# Altium PCB Glucometer-E.C.- Full V1.PcbDoc
Units mm, origin at the board's own origin, x right, y up, seen from the top; angles counter-clockwise.
Board outline 55 x 70 mm, 2 copper layers (Top Layer, Bottom Layer); 47 components, 57 nets, 234 pads, 33 vias.
Unrouted connection lines stored in the file: 1.
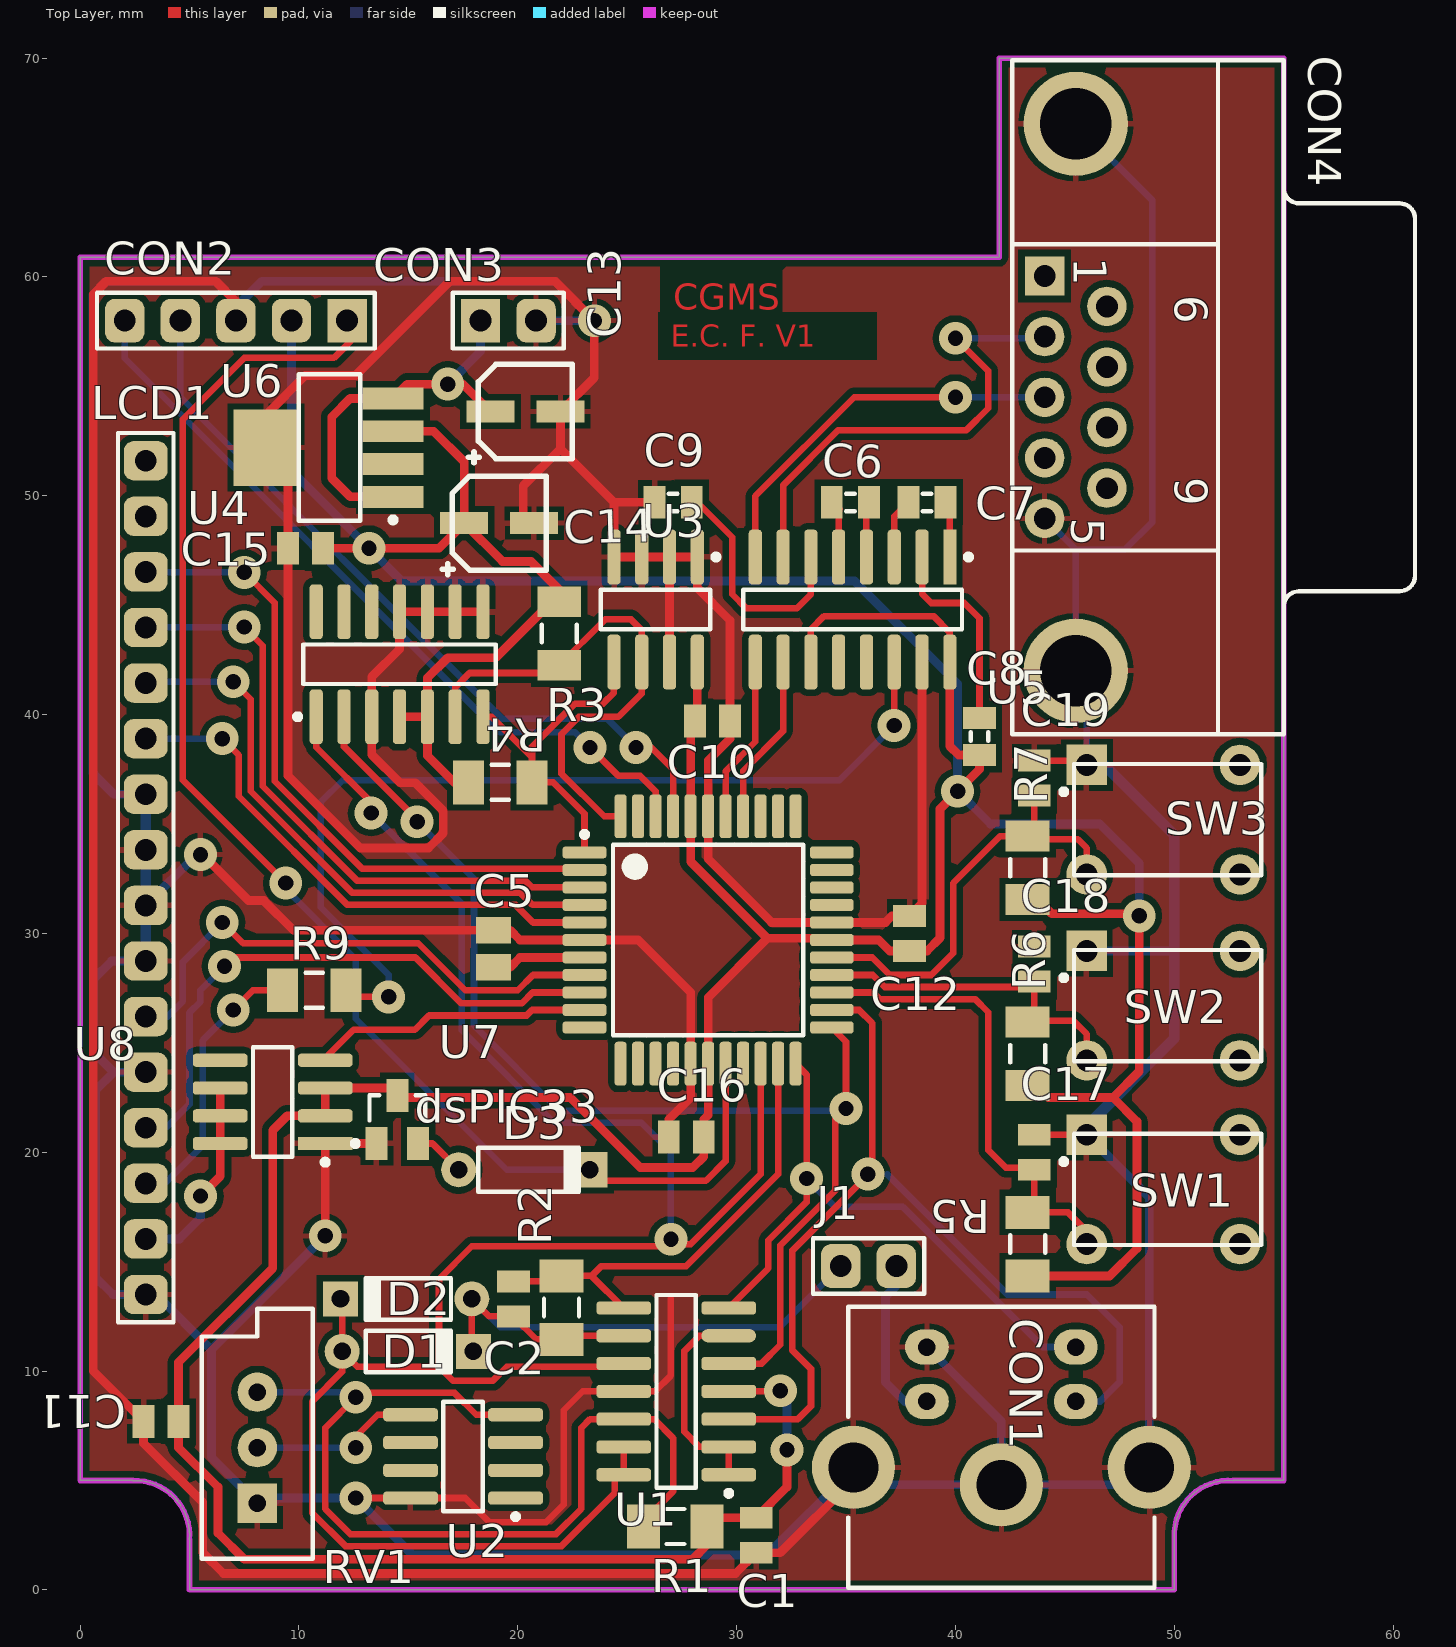
[diagram p0: Top Layer view]
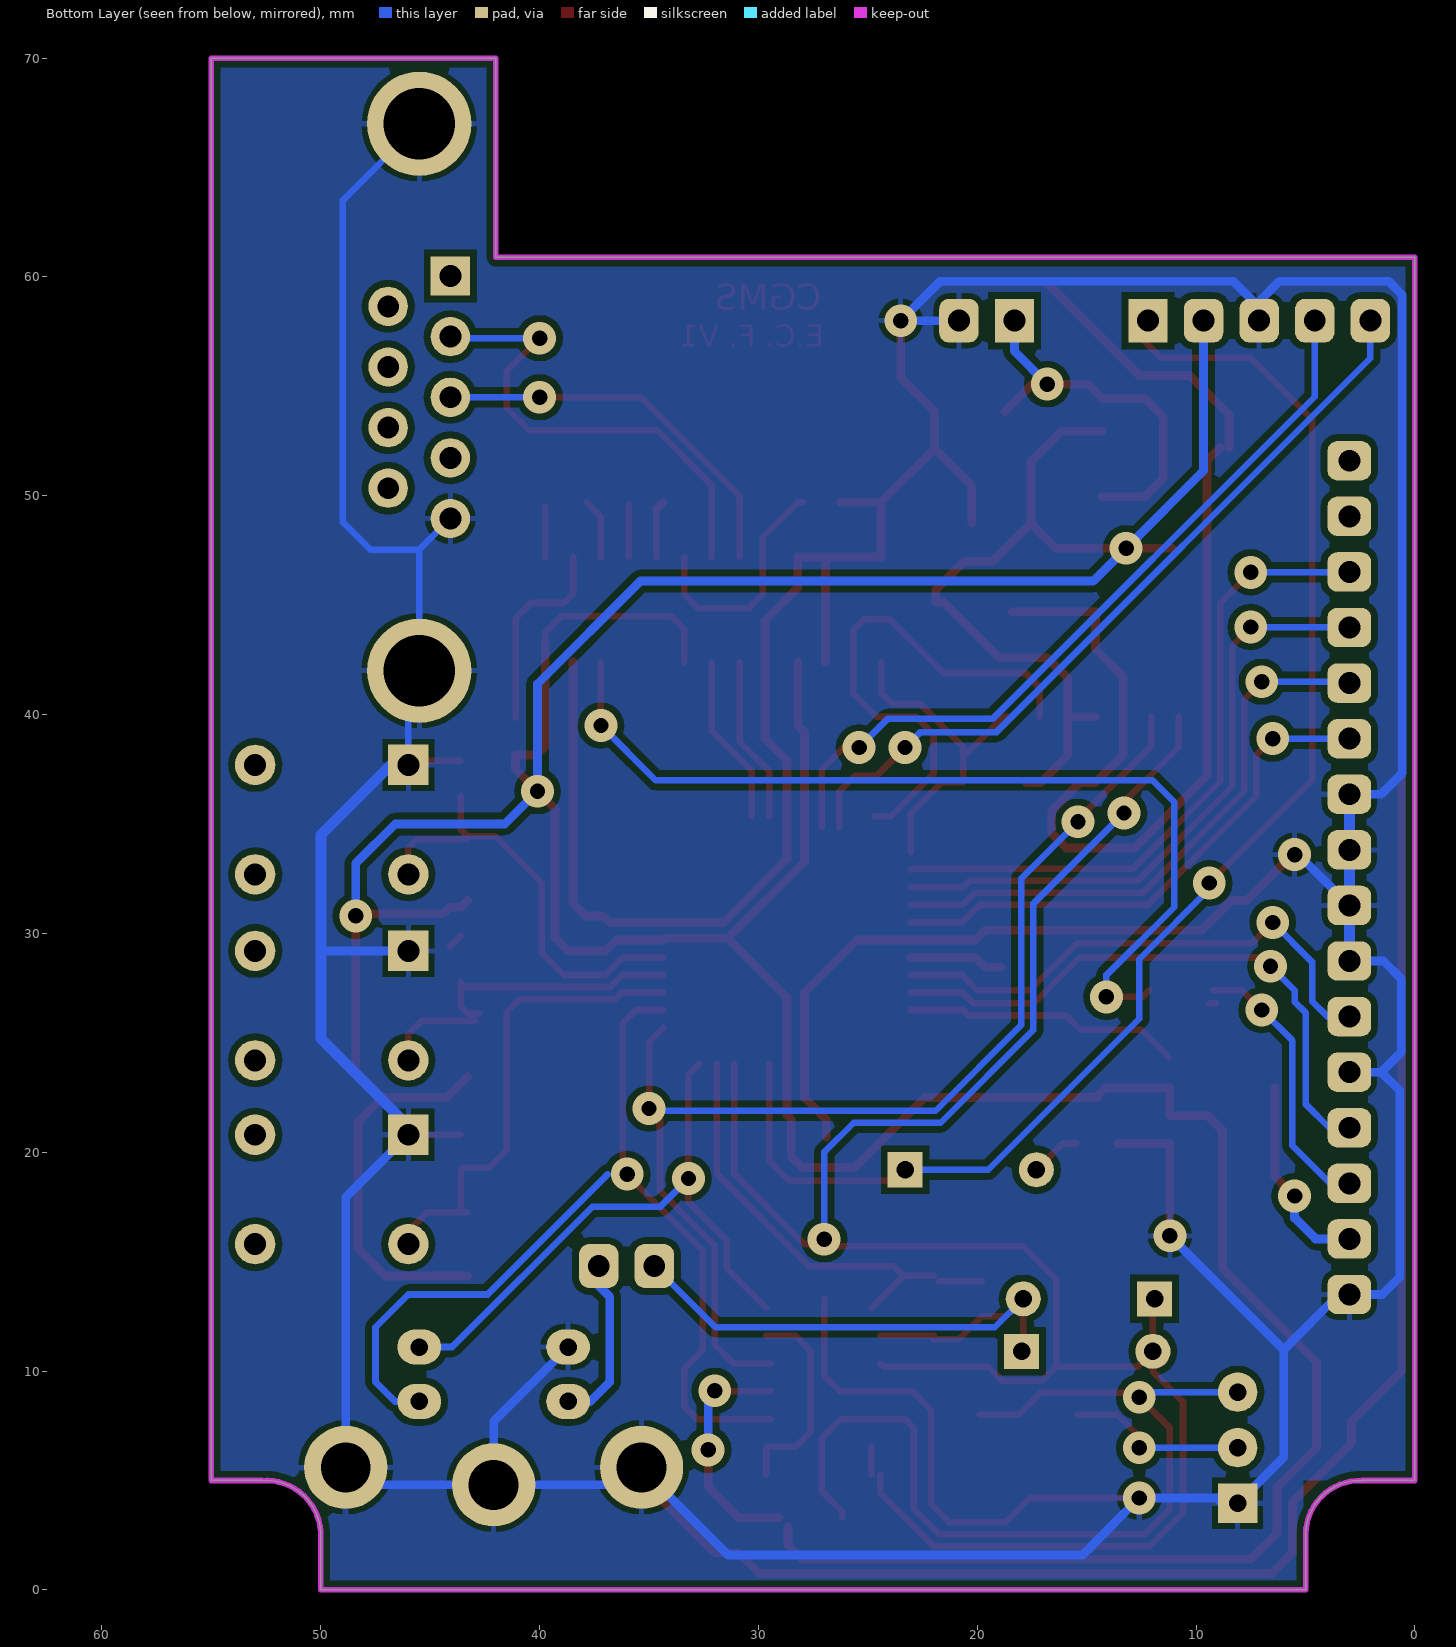
[diagram p1: Bottom Layer view, seen from below]

## Layer stack, top to bottom
Top Layer: signal copper 0.0356
Dielectric: dielectric 0.32, FR-4, Dk 4.8
Bottom Layer: signal copper 0.0356

## Board outline
0,5 2.4,5 2.4,4.998 cw(c2.5,2.5) 4.992,2.301 5,2.301 5,0 50,0 50,2.4 50.002,2.4 cw(c52.5,2.5) 52.699,4.992 52.699,5 55,5 55,70 42,70 42,60.9 0,60.9

## Design rules (kind name [scope] priority, off if disabled: settings)
Clearance [All] p1: gap=0.25
PolygonConnect [All] p1: connectstyle=Relief reliefconductorwidth=0.254 reliefentries=4 polygonreliefangle="90 Angle" airgapwidth=0.254
RoutingVias [All] p1: holewidth=0.711 width=1.27 viastyle="Through Hole" minholewidth=0.711 minwidth=1.27 maxholewidth=0.711 maxwidth=1.27
SolderMaskExpansion [All] p1: expansion=0.102
Width [All] p1: maxlimit=5 minlimit=0.25 preferedwidth=0.3 minimp=50.000000 maximp=50.000000 favimp=50.000000
28 further rules are at their usual default settings.

## Classes and differential pairs
component class "Glucometer-E.C.- Full V1": C1 C2 C5 C6 C7 C8 C9 C10 C13 C14 C15 C16 C17 C18 C19 CON1 CON3 CON4 D1 D2 D3 J1 LCD1 R1 R2 R3 R4 R5 R6 R7 R9 RV1 SW1 SW2 SW3 U1 U2 U3 U4 U5 U6 U7 U8

## Components (designator, comment, footprint, x,y, rotation, side; value= is the part's Value field where it differs from the comment)
C1 "Cap2" CAPC1608N 30.9,2.5 r270 top
C2 "Cap2" CAPC1608N 19.8,13.3 r90 top
C5 "Cap" CAPC2012N 18.9,29.3 r270 top
C6 "Cap" RESC1608N 38.7,49.7 r180 top
C7 "Cap" RESC1608N 35.2,49.7 r180 top
C8 "Cap" RESC1608N 41.1,39 r90 top
C9 "Cap" RESC1608N 27.1,49.7 r180 top
C10 "Cap" CAPC1608N 28.9,39.7 r180 top
C11 "Cap" CAPC1608N 3.7,7.7 r0 top
C12 "Cap" CAPC1608N 37.9,30 r270 top
C13 "Cap Pol2" C-4x4 22.5,56 r180 top
C14 "Cap Pol2" C-4x4 21.3,50.9 r180 top
C15 "Cap" CAPC1608N 10.3,47.6 r0 top
C16 "Cap" CAPC1608N 27.7,20.7 r0 top
C17 "Cap" CAPC1608N 43.6,20 r270 top
C18 "Cap" CAPC1608N 43.6,28.6 r270 top
C19 "Cap" CAPC1608N 43.6,37.1 r270 top
CON1 "" CDIN2.6-3H4A 42.1,0.1 r90 top
CON2 "Header 5" HDR1X5 12.2,58 r180 top
CON3 "Header 2" HDR1X2#1 18.3,58 r0 top
CON4 "D Connector 9" DSUB1.385-2H9 55,54.5 r270 top
D1 "1N4148" DO-35#1 15,10.9 r0 top
D2 "1N4148" DO-35#2 15,13.3 r180 top
D3 "1N4148" DO-35#3 20.5,19.2 r0 top
dsPIC33 "DSPIC33FJ64MC804-I/PT" TQFP-PT44_N 28.7,29.7 r0 top
J1 "Header 2" HDR1X2#2 37.3,14.8 r180 top
LCD1 "162A" HDR1X16 3,13.5 r90 top locked
R1 "Res1" RESC3216N#1 27.2,2.9 r0 top
R2 "Res1" RESC3216N#1 22,12.9 r270 top
R3 "Res1" RESC3216N#2 21.9,43.7 r270 top
R4 "Res1" RESC3216N#2 19.2,36.9 r0 top
R5 "Res1" RESC3216N#1 43.3,15.8 r270 top
R6 "Res1" RESC3216N#2 43.3,24.5 r270 top
R7 "Res1" RESC3216N#2 43.3,33 r270 top
R9 "Res1" RESC3216N#2 10.7,27.4 r0 top
RV1 "RPot" VR5 8.1,6.5 r90 top
SW1 "SW-PB" DPST-4 49.7,18.3 r0 top
SW2 "SW-PB" DPST-4 49.7,26.7 r0 top
SW3 "SW-PB" DPST-4 49.7,35.2 r0 top
U1 "LMC6044IN" M14A_N 27.241,9.074 r180 top
U2 "LM385BM" M08A_N 17.5,6.1 r180 top
U3 "24AA1025-I/SN" SOIC-SN8_N 26.3,44.8 r270 top
U4 "AD5241" R-14_N 14.6,42.3 r90 top
U5 "MAX3232CSE" NSO16_N 35.3,44.8 r270 top
U6 "LP38693MP-3.3/NOPB" MP05A_N 11.4,52.2 r180 top
U7 "Supply Voltage Supervisor" SOT23 14.5,21.5 r0 top
U8 "Power Switch ST" SO8_N 8.8,22.3 r180 top

## Footprints (in the part's own frame and the unit in brackets; to place one, negate y for a bottom-side part, rotate by r counter-clockwise, add the part's x,y. Pads: shape width x height; smd on the part's side, far side on the other; paste and mask are expansions set on the pad)
C-4x4 [mm] "SMD Polar Aluminium Capacitor, 4x4mm, 10V"
  rect 2.2x1 smd: 1(3.75,2.15) 2(0.55,2.15)
  silkscreen extent 0,0 4.75,4.5, body extent 0,0 4.3,4.3, height 5.4
CAPC1608N [mm] "Chip Capacitor, Body 1.6x0.8mm, IPC Medium Density"
  rect 1x1.5 smd: 1(-0.8,0) 2(0.8,0)
  body extent -0.87,-0.48 0.87,0.48, height 0.85
CAPC2012N [mm] "Chip Capacitor, Body 2.0x1.3mm, IPC Medium Density"
  rect 1.2x1.6 smd: 1(-0.85,0) 2(0.85,0)
  body extent -1.1,-0.72 1.1,0.72, height 1.1
CDIN2.6-3H4A [mm] "Connector; Circular DIN, Thru-Hole; 4 Position; Right Angle; Pitch 2.1/2.6 mm; Body 14 x 12.84 x 13 mm (WxTxH), Shielded, Special PCB Retention"
  oval 1.6x2 hole 0.8: 1(8.51,-3.4) 2(8.51,3.4) 3(11,-3.4) 4(11,3.4)
  round 3.8 hole 2.28: MH1(5.5,-6.76) MH2(4.7,0) MH3(5.5,6.76)
  silkscreen extent 0,-7 12.84,7, body extent 0,-7 12.84,7, height 13
DO-35#1 [mm] "Diode, Axial; Body 3.8 x 1.9 mm (LxDia. max), Lead Dia. 0.53 mm (max)"
  round 1.6 hole 0.8: 1(-3.025,0)
  rect 1.6x1.6 hole 0.8: 2(2.975,0)
  silkscreen extent -1.95,-0.95 2.05,0.95
DO-35#2 [mm] "Diode, Axial; Body 3.8 x 1.9 mm (LxDia. max), Lead Dia. 0.53 mm (max)"
  round 1.6 hole 0.8: 1(-2.9,0)
  rect 1.6x1.6 hole 0.8: 2(3.1,0)
  silkscreen extent -1.95,-0.95 2.05,0.95
DO-35#3 [mm] "Diode, Axial; Body 4.6 x 2 mm (LxDia. max), Lead Dia. 0.53 mm (max)"
  round 1.6 hole 0.8: 1(-3.2,0)
  rect 1.6x1.6 hole 0.8: 2(2.8,0)
  silkscreen extent -2.3,-1 2.4,1
DPST-4 [mm] "Switch; 4 Leads"
  rect 1.85x1.85 hole 1: 1(-3.7,2.5)
  round 1.85 hole 1: 2(-3.7,-2.5) 3(3.3,-2.5) 4(3.3,2.5)
  silkscreen extent -4.88,-2.54 4.28,2.54
DSUB1.385-2H9 [mm] "Connector; D Subminiature; 9 Position; Right Angle; Pitch 1.385 mm"
  rect 1.8x1.8 hole 1: 1(-5.54,-10.92)
  round 1.8 hole 1: 2(-2.77,-10.92) 3(0,-10.92) 4(2.77,-10.92) 5(5.54,-10.92) 6(-4.155,-8.08) 7(-1.385,-8.08) 8(1.385,-8.08) 9(4.155,-8.08)
  round 4.76 hole 3.26: 10(-12.495,-9.5) 11(12.495,-9.5)
  silkscreen extent -15.4,-12.4 15.4,6
HDR1X2#1 [mm] "Connector; Header; 2 Position"
  rect 1.8x2 hole 1: 1(0,0)
  rrect50% 1.8x2 hole 1: 2(2.54,0)
  silkscreen extent -1.27,-1.27 3.81,1.27
HDR1X2#2 [mm] "Connector; Header; 2 Position"
  rrect50% 1.8x2 hole 1: 1(0,0) 2(2.54,0)
  silkscreen extent -1.27,-1.27 3.81,1.27
HDR1X5 [mm] "Connector; Header; 5 Position"
  rect 1.8x2 hole 1: 1(0,0)
  rrect50% 1.8x2 hole 1: 2(2.54,0) 3(5.08,0) 4(7.62,0) 5(10.16,0)
  silkscreen extent -1.27,-1.27 11.43,1.27
HDR1X16 [mm] "Connector; Header; 16 Position"
  rrect50% 1.8x2 hole 1: 1(0,0) 2(2.54,0) 3(5.08,0) 4(7.62,0) 5(10.16,0) 6(12.7,0) 7(15.24,0) 8(17.78,0) 9(20.32,0) 10(22.86,0) 11(25.4,0) 12(27.94,0) 13(30.48,0) 14(33.02,0) 15(35.56,0) 16(38.1,0)
  silkscreen extent -1.27,-1.27 39.37,1.27
M08A_N [mm] "SOIC, 8-Leads, Body 4.9x3.9mm, Pitch 1.27mm, IPC Medium Density"
  rrect50% 2.5x0.6 smd: 1(-2.4,1.905) 2(-2.4,0.635) 3(-2.4,-0.635) 4(-2.4,-1.905) 5(2.4,-1.905) 6(2.4,-0.635) 7(2.4,0.635) 8(2.4,1.905)
  silkscreen extent -2.53,-2.5 0.9,2.88, body extent -2,-2.5 2,2.5, height 1.75
M14A_N [mm] "SOIC, 14-Leads, Body 8.6x3.9mm, Pitch 1.27mm, IPC Medium Density"
  rrect50% 2.5x0.6 smd: 1(-2.4,3.81) 2(-2.4,2.54) 3(-2.4,1.27) 4(-2.4,0) 5(-2.4,-1.27) 7(-2.4,-3.81) 8(2.4,-3.81) 9(2.4,-2.54) 10(2.4,-1.27) 11(2.4,0) 12(2.4,1.27) 13(2.4,2.54) 14(2.4,3.81)
  oval 2.5x0.6 smd: 6(-2.4,-2.54)
  silkscreen extent -2.53,-4.4 0.9,4.78, body extent -2,-4.38 2,4.38, height 1.75
MP05A_N [mm] "SOT223, 5-Leads, Body 6.5x3.5mm, Pitch 1.5mm, Lead Span 7mm, IPC Medium Density"
  rect 2.8x1 smd: 1(-2.9,2.25) 2(-2.9,0.75) 3(-2.9,-0.75) 4(-2.9,-2.25)
  rect 3x3.5 smd: 5(2.9,0)
  silkscreen extent -3.03,-3.35 1.4,3.42, body extent -1.85,-3.35 1.85,3.35, height 1.8
NSO16_N [mm] "SOIC, 16-Leads, Body 9.9x3.9mm, Pitch 1.27mm, IPC Medium Density"
  rect 2.5x0.6 smd: 1(-2.4,4.445)
  rrect50% 2.5x0.6 smd: 2(-2.4,3.175) 3(-2.4,1.905) 4(-2.4,0.635) 5(-2.4,-0.635) 6(-2.4,-1.905) 7(-2.4,-3.175) 8(-2.4,-4.445) 9(2.4,-4.445) 10(2.4,-3.175) 11(2.4,-1.905) 12(2.4,-0.635) 13(2.4,0.635) 14(2.4,1.905) 15(2.4,3.175) 16(2.4,4.445)
  silkscreen extent -2.52,-5 0.9,5.42, body extent -2,-5 2,5, height 1.75
R-14_N [mm] "14-Pin Narrow Body Small Outline Integrated Circuit 1.27 mm Pitch, IPC Medium Density"
  rrect50% 2.5x0.6 smd: 1(-2.4,3.81) 2(-2.4,2.54) 3(-2.4,1.27) 4(-2.4,0) 5(-2.4,-1.27) 6(-2.4,-2.54) 7(-2.4,-3.81) 8(2.4,-3.81) 9(2.4,-2.54) 10(2.4,-1.27) 11(2.4,0) 12(2.4,1.27) 13(2.4,2.54) 14(2.4,3.81)
  silkscreen extent -2.52,-4.4 0.9,4.78, body extent -1.95,-4.33 1.95,4.33, height 1.75
RESC1608N [mm] "Chip Resistor, Body 1.6x0.8mm, IPC Medium Density"
  rect 1x1.5 smd: 1(-0.85,0) 2(0.85,0)
  silkscreen extent -0.2,-0.4 0.2,0.4, body extent -0.85,-0.48 0.85,0.48, height 0.6
RESC3216N#1 [mm] "Chip Resistor, Body 3.2x1.6mm, IPC Medium Density"
  rect 1.5x2 smd: 1(-1.45,0) 2(1.45,0)
  silkscreen extent -0.4,-0.8 0.4,0.8, body extent -1.68,-0.87 1.68,0.87, height 0.71
RESC3216N#2 [mm] "Chip Resistor, Body 3.2x1.6mm, IPC Medium Density"
  rect 1.4x2 smd: 1(-1.45,0) 2(1.45,0)
  silkscreen extent -0.4,-0.8 0.4,0.8, body extent -1.68,-0.87 1.68,0.87, height 0.71
SO8_N [mm] "SOIC, 8-Leads, Body 4.9x3.9mm, Pitch 1.27mm, IPC Medium Density"
  rect 2.5x0.6 smd: 1(-2.4,1.905)
  rrect50% 2.5x0.6 smd: 2(-2.4,0.635) 3(-2.4,-0.635) 4(-2.4,-1.905) 5(2.4,-1.905) 6(2.4,-0.635) 7(2.4,0.635) 8(2.4,1.905)
  silkscreen extent -2.53,-2.5 0.9,2.88, body extent -2,-2.5 2,2.5, height 1.75
SOIC-SN8_N [mm] "SOIC, 8-Leads, Body 4.9x3.8mm, Pitch 1.27mm, IPC Medium Density"
  rrect50% 2.5x0.6 smd: 1(-2.4,1.905) 2(-2.4,0.635) 3(-2.4,-0.635) 4(-2.4,-1.905) 5(2.4,-1.905) 6(2.4,-0.635) 7(2.4,0.635) 8(2.4,1.905)
  silkscreen extent -2.52,-2.5 0.9,2.88, body extent -2,-2.5 2,2.5, height 1.75
SOT23 [mm] "SOT-23; 3 Leads; Body 3.0 x 2.6 mm, inc. leads (LxW max)"
  rect 1x1.5 smd: 1(-0.95,-1.1) 2(0.95,-1.1) 3(0,1.1)
  silkscreen extent -2.05,-1.22 1.28,1.1
TQFP-PT44_N [mm] "Thin QFP, 44-Leads, Body 10x10mm, Pitch 0.8mm, IPC Medium Density"
  rrect50% 2x0.55 smd: 1(-5.65,4) 2(-5.65,3.2) 3(-5.65,2.4) 4(-5.65,1.6) 5(-5.65,0.8) 6(-5.65,0) 7(-5.65,-0.8) 8(-5.65,-1.6) 9(-5.65,-2.4) 10(-5.65,-3.2) 11(-5.65,-4) 23(5.65,-4) 24(5.65,-3.2) 25(5.65,-2.4) 26(5.65,-1.6) 27(5.65,-0.8) 28(5.65,0) 29(5.65,0.8) 30(5.65,1.6) 31(5.65,2.4) 32(5.65,3.2) 33(5.65,4)
  rrect50% 0.55x2 smd: 12(-4,-5.65) 13(-3.2,-5.65) 14(-2.4,-5.65) 15(-1.6,-5.65) 16(-0.8,-5.65) 17(0,-5.65) 18(0.8,-5.65) 19(1.6,-5.65) 20(2.4,-5.65) 21(3.2,-5.65) 22(4,-5.65) 34(4,5.65) 35(3.2,5.65) 36(2.4,5.65) 37(1.6,5.65) 38(0.8,5.65) 39(0,5.65) 40(-0.8,5.65) 41(-1.6,5.65) 42(-2.4,5.65) 43(-3.2,5.65) 44(-4,5.65)
  silkscreen extent -5.77,-4.35 4.35,4.95, body extent -5,-5 5,5, height 1.2
VR5 [mm] "Thru-Hole; 3 Leads"
  rect 1.8x1.8 hole 0.8: 1(-2.54,0)
  round 1.8 hole 0.8: 2(0,0) 3(2.54,0)
  silkscreen extent -5.08,-2.54 6.35,2.54

## Part data
C1 C2 C5 C6 C7 C8 C9 C10 C11 C12 C15 C16 C17 C18 C19: "Capacitor"
C13 C14: "Polarized Capacitor (Axial)"
CON1: library part "MiniDin 4Pins - SuperVideo", "MiniDin 4 Pins"
CON2: "Header, 5-Pin"
CON3 J1: "Header, 2-Pin"
CON4: "Receptacle Assembly, 9 Position, Right Angle"
D1 D2 D3: "High Conductance Fast Diode"
dsPIC33: "High-Performance 16-bit Digital Signal Controller, 64 KB Flash, 16 KB RAM, 44-Pin TQFP, Industrial Temperature"
LCD1: "16 char * 2 line LCD character display with b/light"
R1 R2 R3 R4 R5 R6 R7 R9: "Resistor"
RV1: "Potentiometer"
SW1 SW2 SW3: "Switch"
U1: "CMOS Quad Micropower Operational Amplifier, 14-pin MDIP"
U2: "Adjustable Micropower Voltage Reference, 8-pin Narrow SOIC"
U3: "1 Mbit, 400kHz, 1.7V, 8-Pin SOIC 150mil, Industrial Temperature"
U4: "AD5241BR"
U5: "3.0V TO 5.5V, Low-Power, up to 1Mbps, True RS-232 Transceiver Using Four 0.1µF External Capacitor"
U6: "500mA Low Dropout CMOS Linear Regulators Stable with Ceramic Output Capacitors, 5-pin SOT-223, Pb-Free"
U8: "STMPS2161"

## Via types
v1: diameter 1.5, hole 0.7, Top Layer to Bottom Layer, 33 vias

## Nets (pads, with @x,y where several pads share a name; then routed paths per layer and width w, separated by ;. In a path a pad name is that pad's centre, name@x,y a point inside that pad or via, vN(x,y) a via of type N, cw(c..) or ccw(c..) an arc to the next point about the centre after c; other vN are vias at no path point)
3.3V: C1.1 C8.1 C10.2 C11.2 C12.2 C14.1 C15.2 C16.2 CON2.2 dsPIC33.17 dsPIC33.28 dsPIC33.40 R1.2 R3.1 R4.1 R5.2 R6.2 R7.2 U1.4 U3.8 U4.4 U4.5 U5.11 U5.16 U6.3 U7.3 U8.2 U8.3 | length 260.8
  Top Layer w0.3: U1.4@29.441,9.074 v1@31.974,9.074 ; U5.11 33.395,43.895 34,44.5 39,44.5 39.745,43.755 U5.16@39.745,43.296
  Top Layer w0.4: C15.2 v1(13.2,47.6) 16.4,47.6 C14.1 ; U6.3 16.15,52.95 17.55,51.55 C14.1 ; U7.3@14.5,22.5 22.4,22.5 25.6,19.3 28,19.3 28.5,19.8 C16.2 28.5,21.5 28.7,21.7 dsPIC33.17 28.7,27.069 31.406,29.775 ; U7.3 14.165,22.935 U8.3 U8.2 9.465,21.665 8.8,21 8.8,14.7 4.5,10.4 C11.2 4.5,6.5 6.3,4.7 6.3,2.6 7.5,1.4 28,1.4 28.65,2.05 R1.2 ; U4.4 U4.5 ; R4.1 17.1,36.9 15.87,38.13 U4.5 ; U3.8 28.205,39.5 27.9,39.195 dsPIC33.40 27.9,33.281 31.406,29.775 ; R1.2@29.05,3.3 C1.1 32.3,4.7 v1(32.3,6.4) ; v1@31.974,9.074 v1(32,9.1) ; U5.16@39.745,43.296 U5.16 39.745,38.555 40.15,38.15 C8.1 41.1,37.5 v1(40.1,36.5) 39.3,35.7 39.3,29.8 38.7,29.2 C12.2 37,29.2 36.5,29.7 dsPIC33.28 34.275,29.775 31.406,29.775 ; R5.2 47.05,14.35 48.3,15.6 48.3,21.4 47.2,22.5 ; R6.2@43.3,23.45 44.25,22.5 47.2,22.5 ; R7.2@43.3,31.5 43.6,31.2 44.1,31.2 44.4,30.9 48.4,30.9 v1(48.4,30.8) 48.4,23.7 47.2,22.5 ; U4.5 15.87,41.67 16.8,42.6 19,42.6 21.55,45.15 R3.1 21.9,45.7 20.6,47 19.3,47 C14.1
  Bottom Layer w0.4: CON2.2 9.66,51.14 v1(13.2,47.6) 14.7,46.1 35.4,46.1 40.1,41.4 v1(40.1,36.5) 41.6,35 46.6,35 48.4,33.2 v1(48.4,30.8) ; v1(32,9.1) 32.3,8.8 v1(32.3,6.4)
-V: R9.2 U5.14 | length 42.8
  Top Layer w0.3: R9.2 12.45,27.1 v1(14.1,27.1) ; v1(37.2,39.5) U5.14@37.2,42.395
  Bottom Layer w0.3: v1(14.1,27.1) 14.1,28.1 11,31.2 11,36 12,37 34.7,37 v1(37.2,39.5)
BTN_D: C19.2 dsPIC33.27 R7.1 SW3.2 | length 19.8
  Top Layer w0.3: dsPIC33.27 36.2,28.9 37,28.1 38.9,28.1 39.9,29.1 39.9,32.3 42.05,34.45 R7.1 43.6,34.75 C19.2 ; R7.1@43.3,34.3 45.6,34.3 46,33.9 SW3.2
BTN_E: C18.2 dsPIC33.26 R6.1 SW2.2 | length 16.6
  Top Layer w0.3: dsPIC33.26 36.222,28.1 36.772,27.55 C18.2@43.6,27.55 ; R6.1@42.75,26.35 R6.1@43.3,26.35 ; C18.2 43.6,26.65 42.95,26 45.4,26 46,25.4 SW2.2
BTN_U: C17.2 dsPIC33.25 R5.1 SW1.2 | length 21.6
  Top Layer w0.3: dsPIC33.25 36.244,27.3 36.544,27 40.9,27 41.5,26.4 41.5,20.1 42.3,19.3 43.5,19.3 C17.2 R5.1@43.6,17.55 ; R5.1 45.15,17.25 46,16.4 SW1.2
CNT: CON1.3 dsPIC33.22 U1.7 | length 28.3
  Top Layer w0.3: U1.7 31.45,14.693 31.45,15.972 33.2,17.722 v1(33.2,18.8) 33.2,23.55 dsPIC33.22
  Bottom Layer w0.3: v1(33.2,18.8) 34.5,17.5 37.6,17.5 44,11.1 CON1.3
DB4: dsPIC33.5 LCD1.11 | length 24.6
  Top Layer w0.3: v1(6.5,38.9) 7.25,38.15 7.25,36.268 12.218,31.3 19.9,31.3 20.7,30.5 dsPIC33.5
  Bottom Layer w0.3: LCD1.11 v1(6.5,38.9)
DB5: dsPIC33.4 LCD1.12 | length 26.8
  Top Layer w0.3: v1(7,41.5) 7.8,40.7 7.8,36.496 12.446,31.85 20.128,31.85 20.678,31.3 dsPIC33.4
  Bottom Layer w0.3: LCD1.12 3.06,41.5 v1(7,41.5)
DB6: dsPIC33.3 LCD1.13 | length 28.8
  Top Layer w0.3: v1(7.5,44) 8.35,43.15 8.35,36.724 12.674,32.4 20.356,32.4 20.656,32.1 dsPIC33.3
  Bottom Layer w0.3: LCD1.13 3.02,44 v1(7.5,44)
DB7: dsPIC33.2 LCD1.14 | length 30.4
  Top Layer w0.3: v1(7.5,46.5) 8.9,45.1 8.9,36.951 12.901,32.95 23,32.95 dsPIC33.2
  Bottom Layer w0.3: LCD1.14@3.02,46.5 v1(7.5,46.5)
E: dsPIC33.8 LCD1.6 | length 24.5
  Top Layer w0.3: v1(6.5,30.5) 7.45,29.55 15.45,29.55 17.6,27.4 20,27.4 20.7,28.1 dsPIC33.8
  Bottom Layer w0.3: LCD1.6 4,26.2 4.7,26.9 4.7,28.7 v1(6.5,30.5)
GND: C1.2 C5.1 C9.2 C10.1 C11.1 C12.1 C13.2 C14.2 C15.1 C16.1 C17.1 C18.1 C19.1 CON1.4 CON1.MH1 CON1.MH2 CON1.MH3 CON2.3 CON3.2 CON4.5 CON4.10 CON4.11 dsPIC33.6 dsPIC33.16 dsPIC33.29 dsPIC33.39 LCD1.1 LCD1.5 LCD1.7 LCD1.8 LCD1.9 LCD1.10 RV1.1 SW1.1 SW2.1 SW3.1 U1.11 U2.8 U3.1 U3.2 U3.3 U3.4 U3.7 U4.3 U4.8 U4.9 U4.10 U4.11 U5.15 U6.5 U7.1 U8.1 | length 524.3
  Top Layer w0.3: v1(12.6,4.2) 17.6,4.2 18.7,3.1 21.3,3.1 22.1,3.9 22.1,8.208 22.966,9.074 U1.11 26.274,9.074 27,9.8 27,13.3 ; C17.1 45.6,20.8 SW1.1@46.1,21.3 ; C18.1@43.6,29.9 C18.1@44.1,29.4 ; C19.1 SW3.1@45.8,37.9 ; SW2.1@46,29.4 SW2.1@46.1,29.4
  Top Layer w0.4: v1@5.4,33.5 v1@5.5,33.5 ; v1(5.5,33.6) v1@5.5,33.5 ; CON2.3 7.12,58.88 6.2,59.8 1.2,59.8 0.6,59.2 0.6,10 C11.1 2.9,6.7 5.6,4 5.6,1.7 6.55,0.75 29.95,0.75 C1.2 32,1.7 35.34,5.04 CON1.MH3 ; U6.5 8.5,53.7 10.3,55.5 12.6,55.5 16.9,59.8 21.7,59.8 v1(23.5,58) 23.5,55.4 C13.2 21.95,52.15 ; U6.5@8.9,52.2 9.5,51.6 C15.1 9.5,37.2 12.8,33.9 15.92,33.9 16.6,34.58 16.6,35.6 15.32,36.88 14.62,36.88 13.33,38.17 U4.3 13.33,41.73 14.6,43 U4.11 U4.10 U4.9 U4.8 ; v1(11.2,16.181) U8.1 U7.1@13.545,20.395 ; C14.2@20.25,48.75 20.25,50.45 21.95,52.15 ; U3.4 U3.3 U3.2 ; U3.4@24.4,47.205 24.4,49.7 ; C9.2 24.4,49.7 ; C16.1 26.9,21.5 27.9,22.5 dsPIC33.16 27.9,27.3 25.5,29.7 dsPIC33.6 20.1,29.7 19.65,30.15 C5.1 9.75,30.15 8.4,31.5 7.7,31.5 5.7,33.5 v1@5.5,33.5 ; U3.7 U3.2 ; U5.15 38.475,31.375 C12.1 37.1,30.8 36.8,30.5 dsPIC33.29 31.6,30.5 28.7,33.4 dsPIC33.39 28.7,37.9 29.7,38.9 C10.1 29.7,44.3 28.205,45.795 U3.1 U3.2 ; 21.95,52.15 24.4,49.7
  Bottom Layer w0.3: CON4.5 45.5,47.54 ; CON4.10 49,63.495 49,48.8 47.74,47.54 45.5,47.54 ; SW3.1 46,41.505 CON4.11 45.5,47.54
  Bottom Layer w0.4: LCD1.5 1.54,23.66 ; LCD1.7 1.44,28.74 0.627,27.927 0.627,24.573 1.54,23.66 ; LCD1.8 v1@5.32,33.6 ; LCD1.10 1.54,36.36 0.577,37.323 0.577,59.177 1.2,59.8 6.2,59.8 7.12,58.88 CON2.3@7.12,58.62 ; CON2.3 CON2.3@7.12,58.62 ; RV1.1 6,6.06 6,10.981 ; RV1.1@8.8,3.96 9.04,4.2 v1(12.6,4.2) 14.8,2 ; v1(11.2,16.181) 6,10.981 ; 14.8,1.977 15.177,1.6 31.4,1.6 CON1.MH3@35.34,5.54 ; CON3.2 v1(23.5,58) 21.7,59.8 8.3,59.8 CON2.3@7.12,58.62 ; CON1.MH3 36.14,4.8 CON1.MH2 ; CON1.4 42.1,7.7 CON1.MH2 ; SW1.1 48.86,17.94 CON1.MH1 48.06,4.8 CON1.MH2 ; SW2.1 50,29.2 ; 1.54,23.66 0.7,22.82 0.7,14.3 1.5,13.5 LCD1.1 3.481,13.5 6,10.981
  Bottom Layer w0.5: LCD1.7 LCD1.8 LCD1.9 LCD1.10 ; SW1.1@45.8,21 50,25.2 50,29.2 50,34.5 SW3.1@46.45,38.05
LCDPWR: dsPIC33.10 U8.4 | length 12.7
  Top Layer w0.3: U8.4@11.25,24.35 12.5,25.6 15.3,25.6 15.95,26.25 20.406,26.25 20.656,26.5 dsPIC33.10
LCDVDD: LCD1.2 U8.6 U8.7 U8.8 | length 9.2
  Top Layer w0.4: v1(5.5,18) 6.4,18.9 U8.8 U8.7 U8.6
  Bottom Layer w0.4: LCD1.2 4.54,16.04 5.5,17 v1(5.5,18)
LCDVO: LCD1.3 R9.1 | length 13.1
  Top Layer w0.3: LCD1.3 LCD1.3@3.03,18.55 ; v1(7,26.5) 7.9,27.4 R9.1 ; R9.1@9.1,26.8 R9.1@9.4,26.8
  Bottom Layer w0.3: LCD1.3 3.88,18.58 5.6,20.3 5.6,25.1 v1(7,26.5)
MCLR: CON2.1 D3.2 dsPIC33.18 | length 66.9
  Top Layer w0.3: v1@9.4,31.9 v1(9.4,32.3) 4.7,37 4.7,53.5 7.5,56.3 11.6,56.3 12.6,57.3 CON2.1@12.6,58.5 ; D3.2 23.8,18.7 28.6,18.7 29.5,19.6 dsPIC33.18
  Bottom Layer w0.3: v1@9.261,32.161 12.6,28.822 12.6,26.1 19.5,19.2 D3.2 ; v1@9.4,31.9 v1(9.4,32.3)
NetC5_2: C5.2 dsPIC33.7 | length 4.3
  Top Layer w0.4: C5.2 19.65,28.45 20.1,28.9 dsPIC33.7
NetC6_1: C6.1 U5.1 | length 2.3
  Top Layer w0.3: U5.1 C6.1@39.745,49.505
NetC6_2: C6.2 U5.3 | length 2.8
  Top Layer w0.3: U5.3 37.205,49.055 C6.2
NetC7_1: C7.1 U5.4 | length 2.4
  Top Layer w0.3: U5.4 C7.1@35.935,49.585
NetC7_2: C7.2 U5.5 | length 2.6
  Top Layer w0.3: U5.5 C7.2@34.665,49.385
  Top Layer w0.4: C7.2 C7.2@34.665,49.385
NetC8_2: C8.2 U5.2 | length 9.3
  Top Layer w0.3: U5.2 38.475,45.525 38.9,45.1 40.4,45.1 41.1,44.4 C8.2
NetC9_1: C9.1 U5.6 | length 10.9
  Top Layer w0.3: C9.1 28.2,49.7 29.8,48.1 29.8,45.5 30.45,44.85 32.75,44.85 33.395,45.495 U5.6
NetD3_1: D3.1 U7.2 | length 2.3
  Top Layer w0.3: U7.2 16.1,20.4 D3.1
NetdsPIC33_11: dsPIC33.11
NetdsPIC33_12: dsPIC33.12
NetdsPIC33_13: dsPIC33.13
NetdsPIC33_14: dsPIC33.14
NetdsPIC33_15: dsPIC33.15
NetdsPIC33_19: dsPIC33.19
NetdsPIC33_30: dsPIC33.30
NetdsPIC33_31: dsPIC33.31
NetdsPIC33_32: dsPIC33.32
NetdsPIC33_33: dsPIC33.33
NetdsPIC33_34: dsPIC33.34
NetdsPIC33_35: dsPIC33.35
NetdsPIC33_36: dsPIC33.36
NetdsPIC33_43: dsPIC33.43
NetR1_1: R1.1 RV1.3 U1.12 U2.4 | length 42.5
  Top Layer w0.3: U2.4 18.105,8.005 17.11,9 12.8,9 v1(12.6,8.8) 11.2,7.4 11.2,3.7 12.35,2.55 21.75,2.55 22.9,3.7 22.9,7.4 23.304,7.804 U1.12 26.236,7.804 27.1,6.94 27.1,4.5 26.175,3.575 R1.1@26.175,3.325
  Bottom Layer w0.3: RV1.3@8.8,9.04 12.36,9.04 v1(12.6,8.8)
NetRV1_3: RV1.2 U2.5 | length 7.5
  Top Layer w0.3: v1(12.6,6.5) 12.6,7 13.6,8 U2.5@15.4,8
  Bottom Layer w0.3: RV1.2@8.8,6.5 v1(12.6,6.5)
NetU1_1: U1.1 U1.2 U1.6 | length 9.6
  Top Layer w0.3: U1.1 U1.2 28.306,6.534 27.616,7.224 27.616,10.924 28.306,11.614 U1.6
PEGC: CON2.5 dsPIC33.42 | length 36.7
  Top Layer w0.3: CON2.5@2.04,57.16 CON2.5 ; v1(23.3,38.5) 24.6,37.2 25.6,37.2 26.3,36.5 dsPIC33.42@26.3,34.85
  Bottom Layer w0.3: CON2.5 2.04,56.282 19.122,39.2 22.6,39.2 v1(23.3,38.5)
PEGD: CON2.4 dsPIC33.41 | length 36.2
  Top Layer w0.3: CON2.4@4.98,58 CON2.4@4.98,58.5 ; v1(25.4,38.5) 26.1,38.5 27.1,37.5 dsPIC33.41@27.1,34.85
  Bottom Layer w0.3: CON2.4 4.58,54.52 19.3,39.8 24.1,39.8 v1(25.4,38.5)
REF: CON1.1 dsPIC33.24 U1.3 | length 43.8
  Top Layer w0.3: U1.3@29.441,7.804 U1.3 32.804,7.804 33.4,8.4 33.4,10.1 32.539,10.961 32.55,10.972 32.55,15.517 36,18.967 v1(36,19) ; dsPIC33.24 35.6,26.5 36.2,25.9 v1@36.2,19.2
  Bottom Layer w0.3: 36.878,19 42.378,13.5 46,13.5 47.5,12 47.5,9.5 46.61,8.61 CON1.1
RS: dsPIC33.9 LCD1.4 | length 27.1
  Top Layer w0.3: v1(6.6,28.5) 7,28.9 15.322,28.9 17.422,26.8 20.178,26.8 20.678,27.3 dsPIC33.9
  Bottom Layer w0.3: LCD1.4 3.92,21.12 5,22.2 5,26.38 5.5,26.88 5.5,27.4 v1(6.6,28.5)
RXD: CON4.2 U5.7 | length 22
  Top Layer w0.3: U5.7 32.125,50.475 34.65,53 40.5,53 41.5,54 41.5,55.7 v1(40,57.2)
  Bottom Layer w0.3: v1(40,57.2) 44.01,57.2 CON4.2
SCL1: dsPIC33.44 R3.2 U3.6 U4.6 | length 24
  Top Layer w0.3: U4.6 17.14,41.24 17.8,41.9 21.55,41.9 R3.2 24,44.35 25.18,44.35 25.665,43.865 25.665,40.965 24.6,39.9 22.8,39.9 22,39.1 22,37.3 23.95,35.35 dsPIC33.44
SDA1: dsPIC33.1 R4.2 U3.5 U4.7 | length 15.6
  Top Layer w0.3: U4.7 18.8,39.9 20.65,38.05 ; dsPIC33.1 23.05,35.472 21.622,36.9 R4.2 20.65,38.05 ; U3.5 24.395,40.995 23.9,40.5 22.622,40.5 20.65,38.528 20.65,38.05
TXD: CON4.3 U5.8 | length 17.9
  Top Layer w0.3: U5.8 30.855,49.983 35.372,54.5 v1(40,54.5)
  Bottom Layer w0.3: v1(40,54.5) CON4.3
U1RX: dsPIC33.38 U5.9 | length 7.6
  Top Layer w0.3: dsPIC33.38 29.5,37.4 30.855,38.755 U5.9
U1TX: dsPIC33.37 U5.10 | length 7.8
  Top Layer w0.3: dsPIC33.37 30.3,37.422 32.125,39.247 U5.10
VCTRL: dsPIC33.23 U1.5 U4.2 | length 53.5
  Top Layer w0.3: U4.2 12.06,38.54 v1@15.05,35.55 ; U1.5@29.441,10.344 31.144,10.344 32,11.2 32,15.744 34.5,18.244 34.5,21.5 v1(35,22) 35,25.05 dsPIC33.23
  Bottom Layer w0.3: v1(15.4,35.1) 18,32.5 18,25.8 21.9,21.9 v1@35,21.9
VDD: C13.1 CON3.1 U6.1 U6.4 | length 17.9
  Top Layer w0.4: U6.1 12.35,49.95 11.5,50.8 11.5,53.6 12.35,54.45 U6.4 14.95,55.1 v1(16.8,55.1) 17.5,55.1 C13.1
  Bottom Layer w0.4: v1(16.8,55.1) 18.3,56.6 CON3.1
VGND: D1.1 D2.2 dsPIC33.20 U1.10 U1.13 U1.14 U4.1 | length 100.1
  Top Layer w0.3: U4.1 10.79,38.51 13.5,35.8 v1@13.5,35.5 ; D2.2@11.975,13.225 D1.1 ; U1.14@24.441,5.264 24.441,4.441 22,2 12.122,2 10.6,3.522 10.6,8.6 11.975,9.975 D1.1 ; U1.10@24.441,10.344 24.297,10.2 19.5,10.2 18.85,9.55 17.05,9.55 16.4,10.2 ; U1.14 U1.13 ; dsPIC33.20 31.1,19 27.9,15.8 27.222,15.8 v1(27,16.022) 26.678,15.7 17.9,15.7 16.4,14.2 16.4,10.2 ; D1.1 12.675,10.2 16.4,10.2
  Bottom Layer w0.3: v1(13.3,35.5) 17.45,31.35 17.45,25.572 21.672,21.35 25.65,21.35 27,20 v1(27,16.022)
VOUT: C2.2 dsPIC33.21 R2.1 U1.8 | length 20.9
  Top Layer w0.3: C2.2 R2.1@21.75,14.1 ; R2.1 23.375,14.35 ; U1.8 23.375,14.35 ; dsPIC33.21 31.9,19 27.7,14.8 23.825,14.8 23.375,14.35
WRK: CON1.2 J1.1 | length 7.8
  Bottom Layer w0.4: J1.1 37.3,13.9 36.8,13.4 36.8,9.5 37.69,8.61 CON1.2
WRKIN: C2.1 D1.2 D2.1 J1.2 R2.2 U1.9 | length 26.7
  Top Layer w0.3: D1.2@17.9,11.675 17.9,12.5 ; D2.1 18.7,12.5 C2.1 20.85,11.45 R2.2 ; R2.2@22,11.614 U1.9@24.441,11.614
  Bottom Layer w0.3: D2.1 19.2,12 31.96,12 J1.2
pads on no net: CON4.1 CON4.4 CON4.6 CON4.7 CON4.8 CON4.9 LCD1.15 LCD1.16 SW1.3 SW1.4 SW2.3 SW2.4 SW3.3 SW3.4 U2.1 U2.2 U2.3 U2.6 U2.7 U4.12 U4.13 U4.14 U5.12 U5.13 U6.2 U8.5

## Polygon pours and split planes (outlines as drawn)
GND on Top Layer "Bottom Layer-No Net" (solid, pour order 5): 0,60.9 42,60.9 42,70 55,70 55,5 50,5 50,0 5,0 5,5 0.2,5 0,5.2 0,60.9
3.3V on Top Layer "Bottom Layer-No Net" (solid, pour order 18): 28.7,24.9 33.5,24.9 33.5,29.5 33.4,29.6 31.4,29.6 31.231,29.6 28.7,27.069 28.7,24.9
GND on Bottom Layer "Bottom Layer-No Net" (solid, pour order 7): 0,60.9 42,60.9 42,70 55,70 55,5 50.1,5 50,4.9 50,0 5,0 5.1,0.1 5.1,5 0,5

## Keep-outs
Keep-Out Layer:
  lines w0.254: 2.4,4.998 cw(c2.5,2.5) 4.992,2.301 ; 2.4,5 0,5 0,60.9 32.9,60.9 42,60.9 42,70 55,70 55,5 52.699,5 ; 5,2.301 5,0 50,0 50,2.4 ; 50.002,2.4 cw(c52.5,2.5) 52.699,4.992

## Other copper
Top Layer:
  text "CGMS" at 27.1,58.5 h1.2
  text "E.C. F. V1" at 27,56.8 h1

## Text inside footprints (layer, text, board x,y; h text height)
CON1: Mechanical 1 "PCB Edge" at 48.8,0.7 h0.25 r180
CON4: Top Overlay "1" at 45.4,60.9 h1.5 r270; Top Overlay "5" at 45.3,49 h1.5 r270; Top Overlay "9" at 50.025,50.845 h1.5 r270; Top Overlay "6" at 50.025,59.155 h1.5 r270